# Altium PCB FPGA_PCB.PcbDoc
Units mm, origin at the board's own origin, x right, y up, seen from the top; angles counter-clockwise.
Board outline 100.13 x 101.96 mm, 4 copper layers (Top Layer, GND, VCC, Bottom Layer), stack 0.971 mm thick; 57 components, 42 nets, 309 pads, 58 vias.
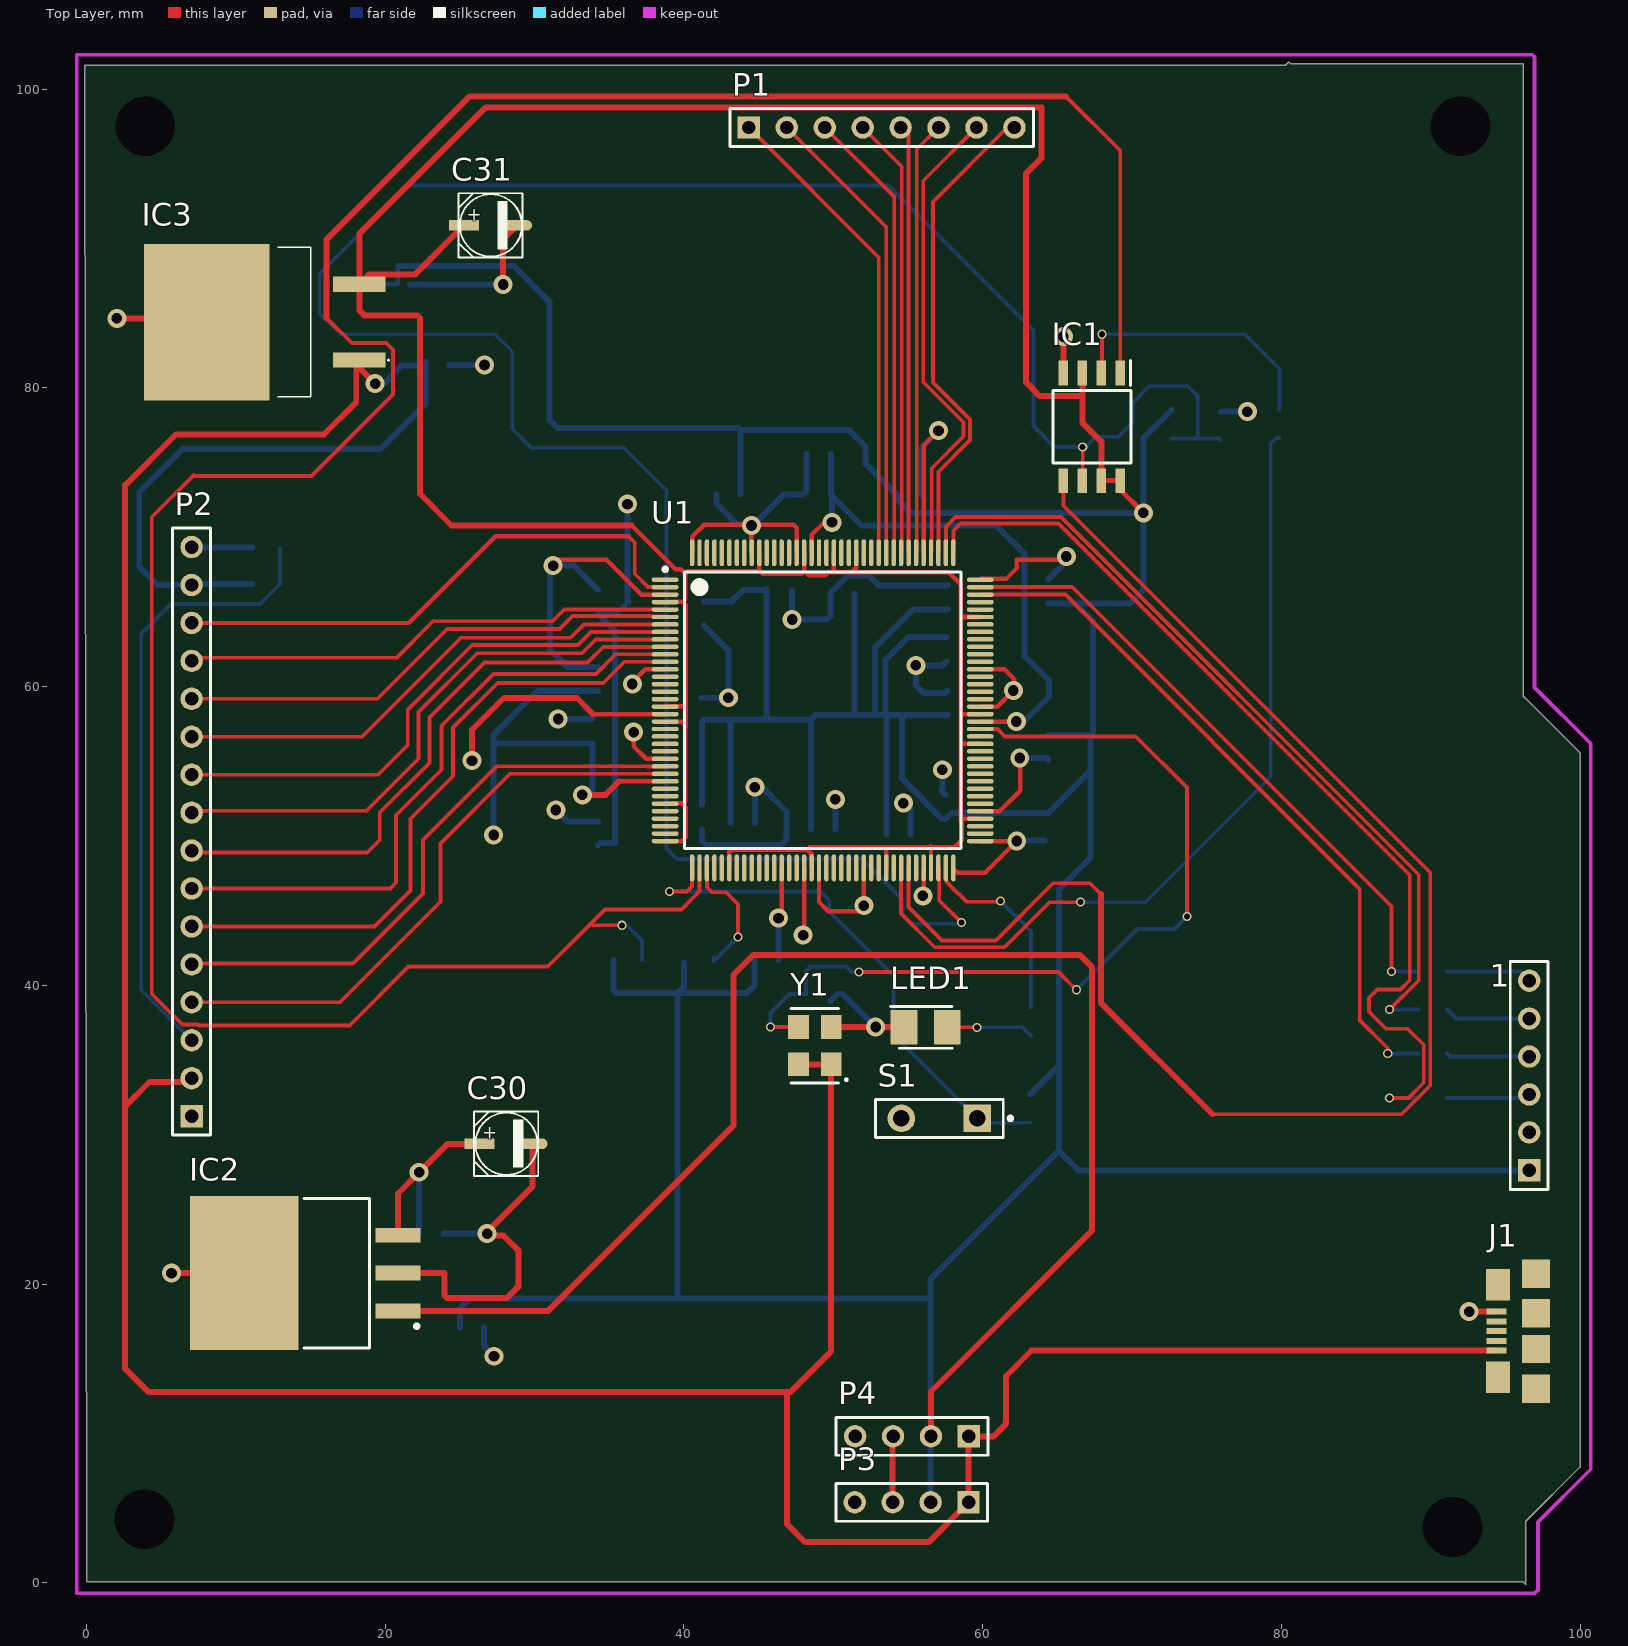
[diagram p0: Top Layer view]
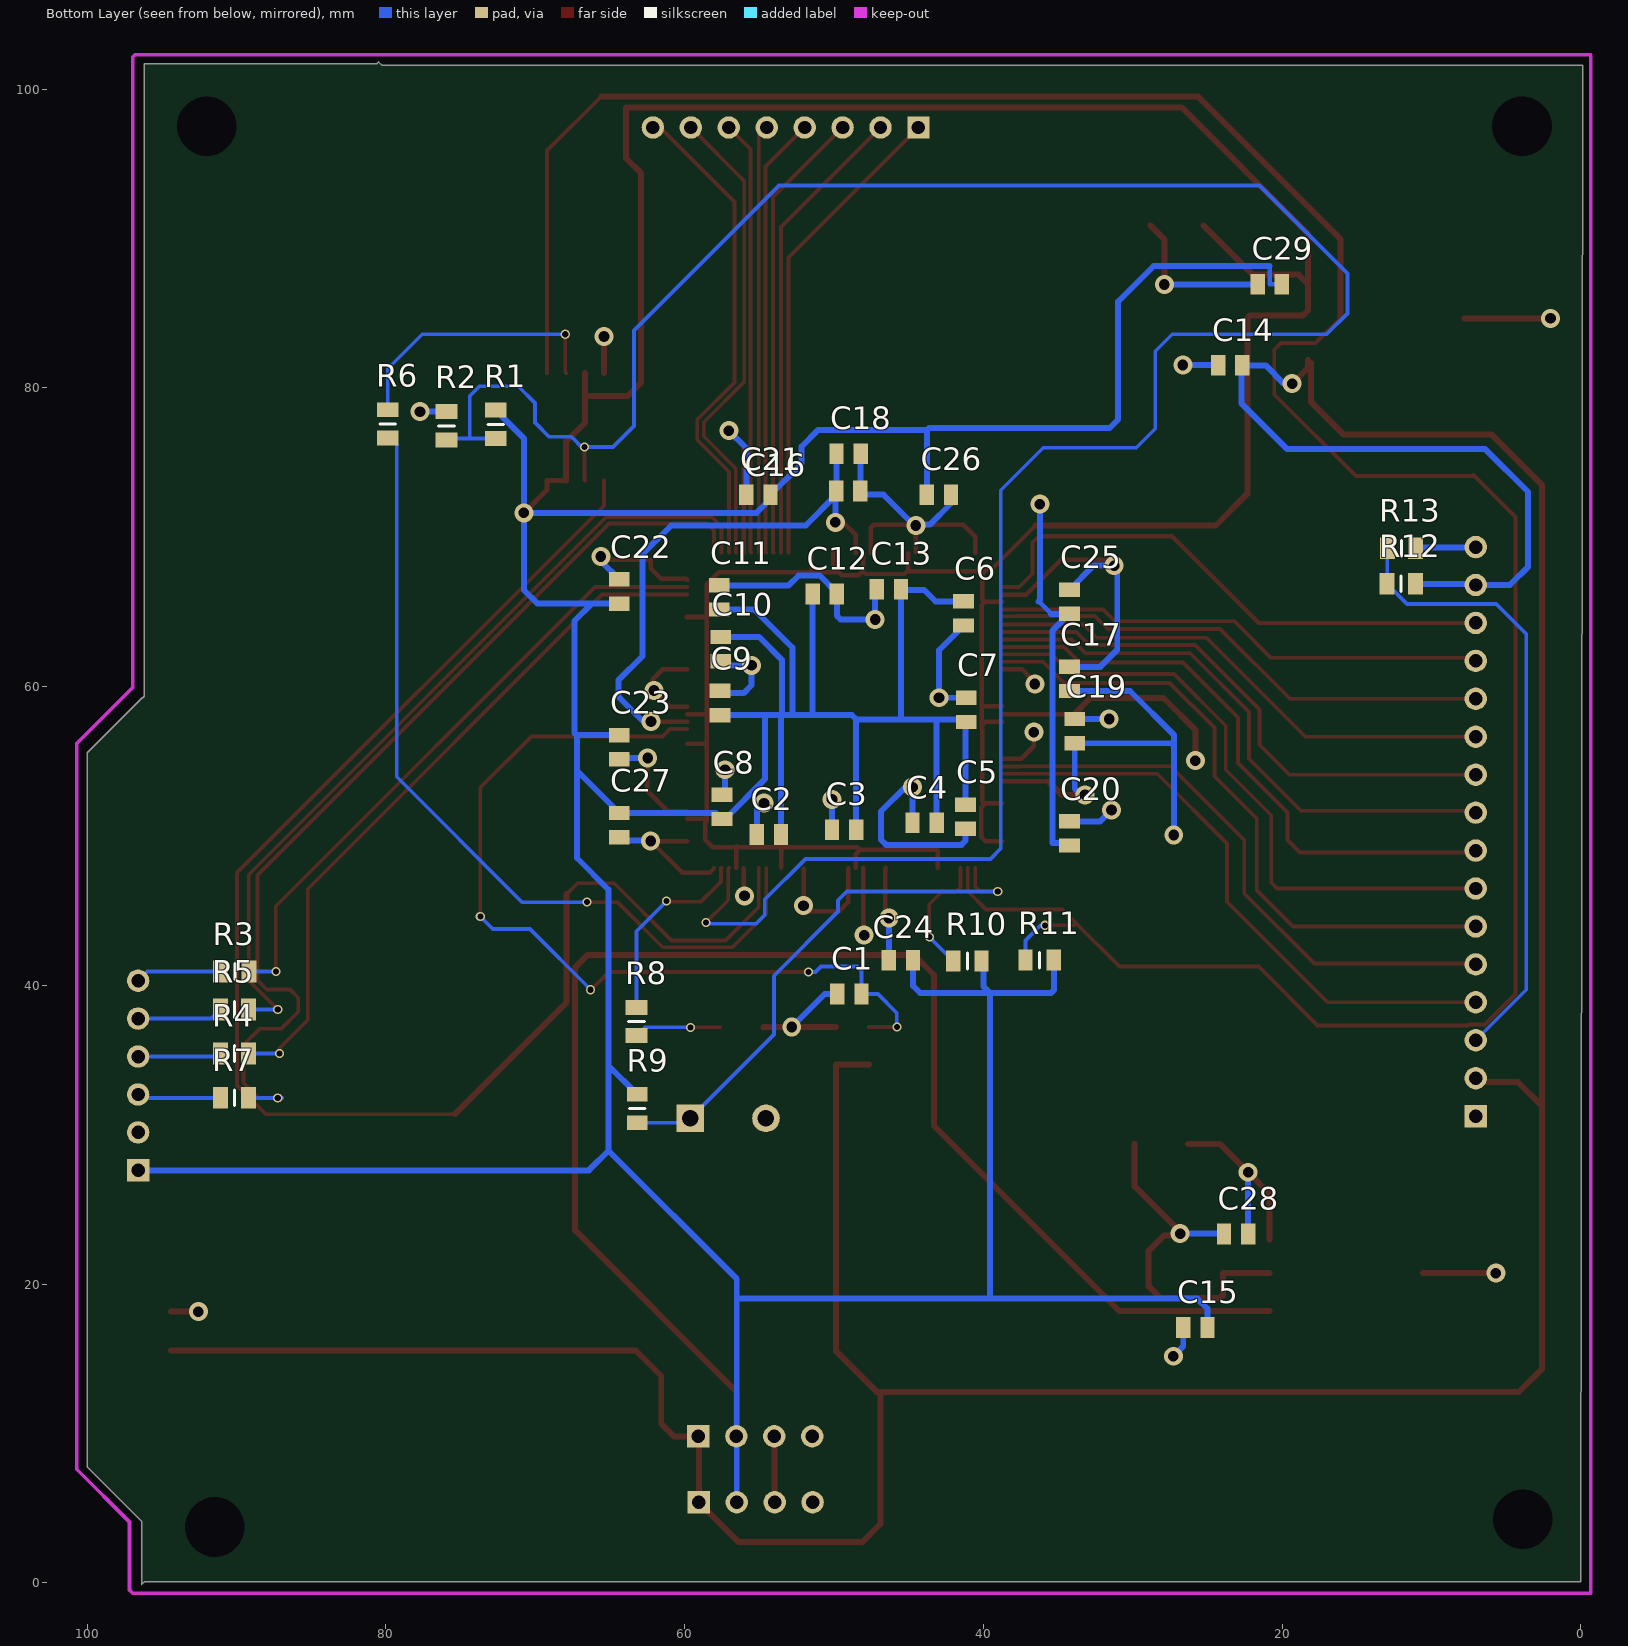
[diagram p1: Bottom Layer view, seen from below]
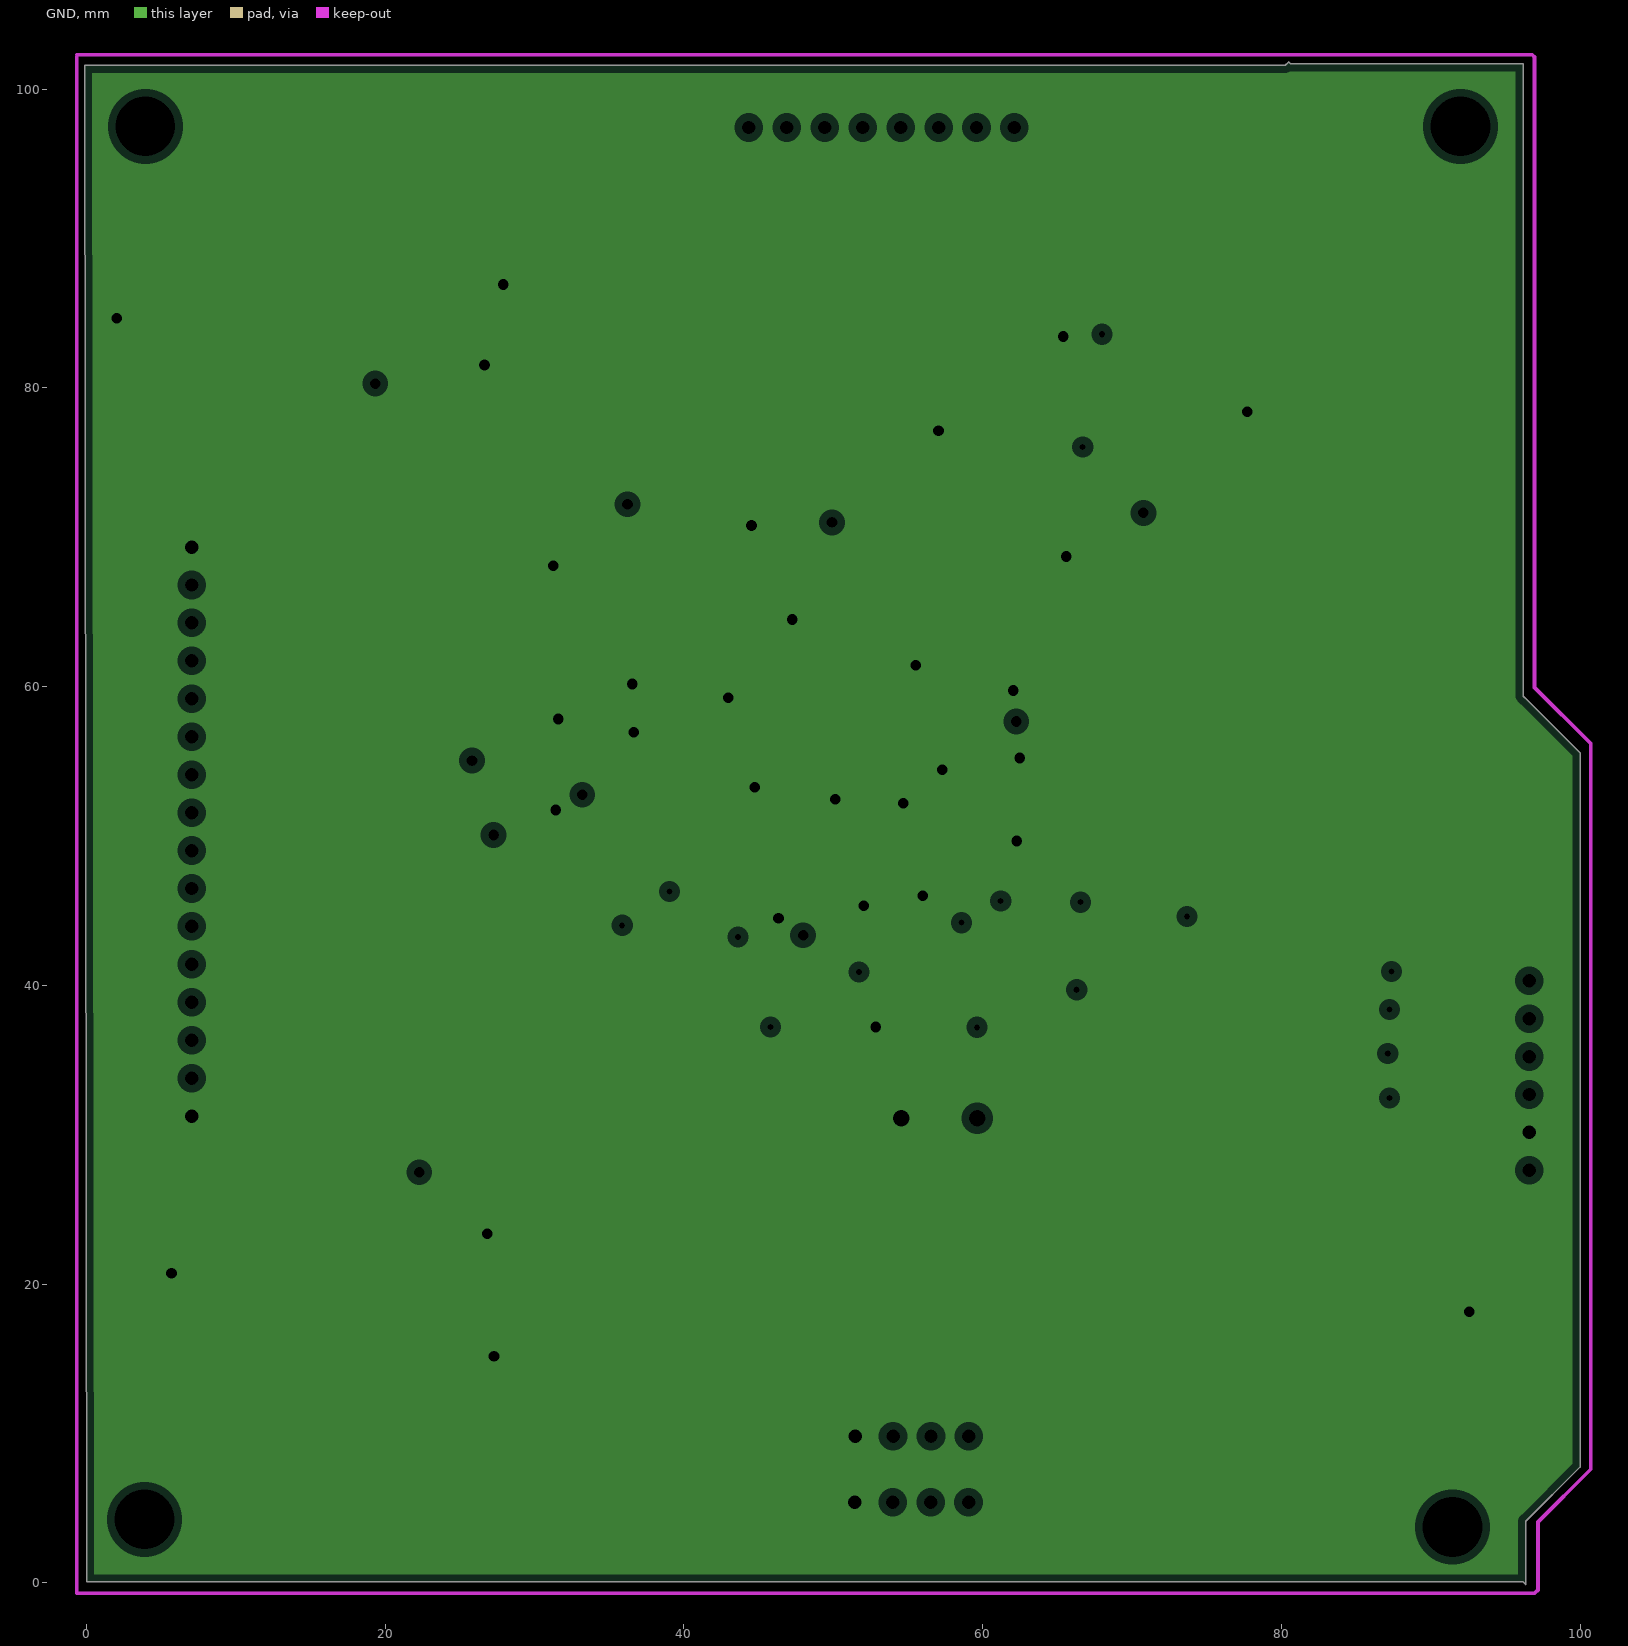
[diagram p2: GND, clearances drawn from the general rule]
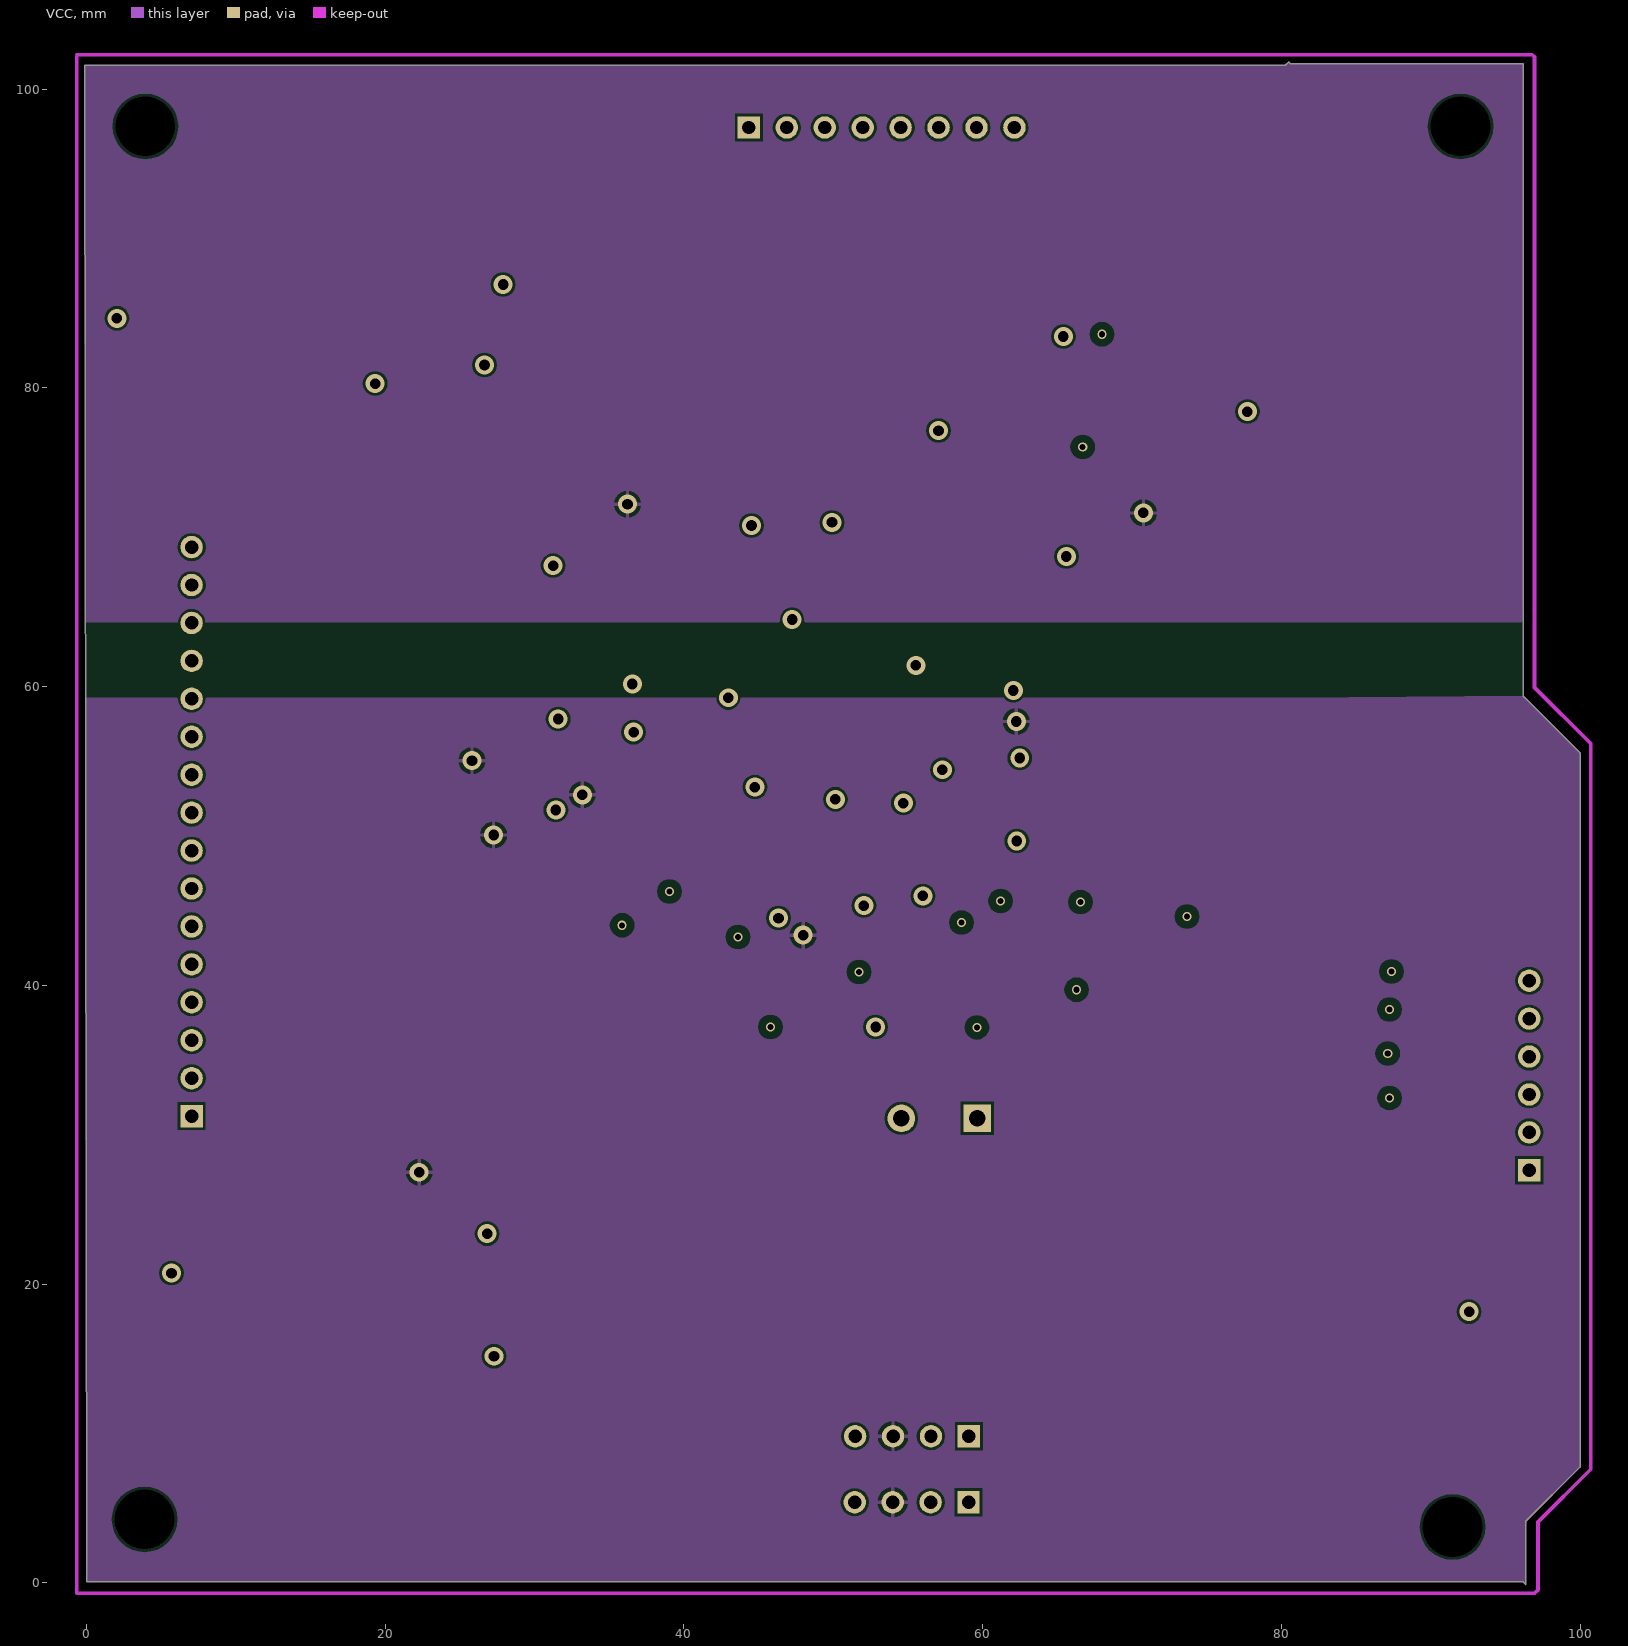
[diagram p3: VCC]
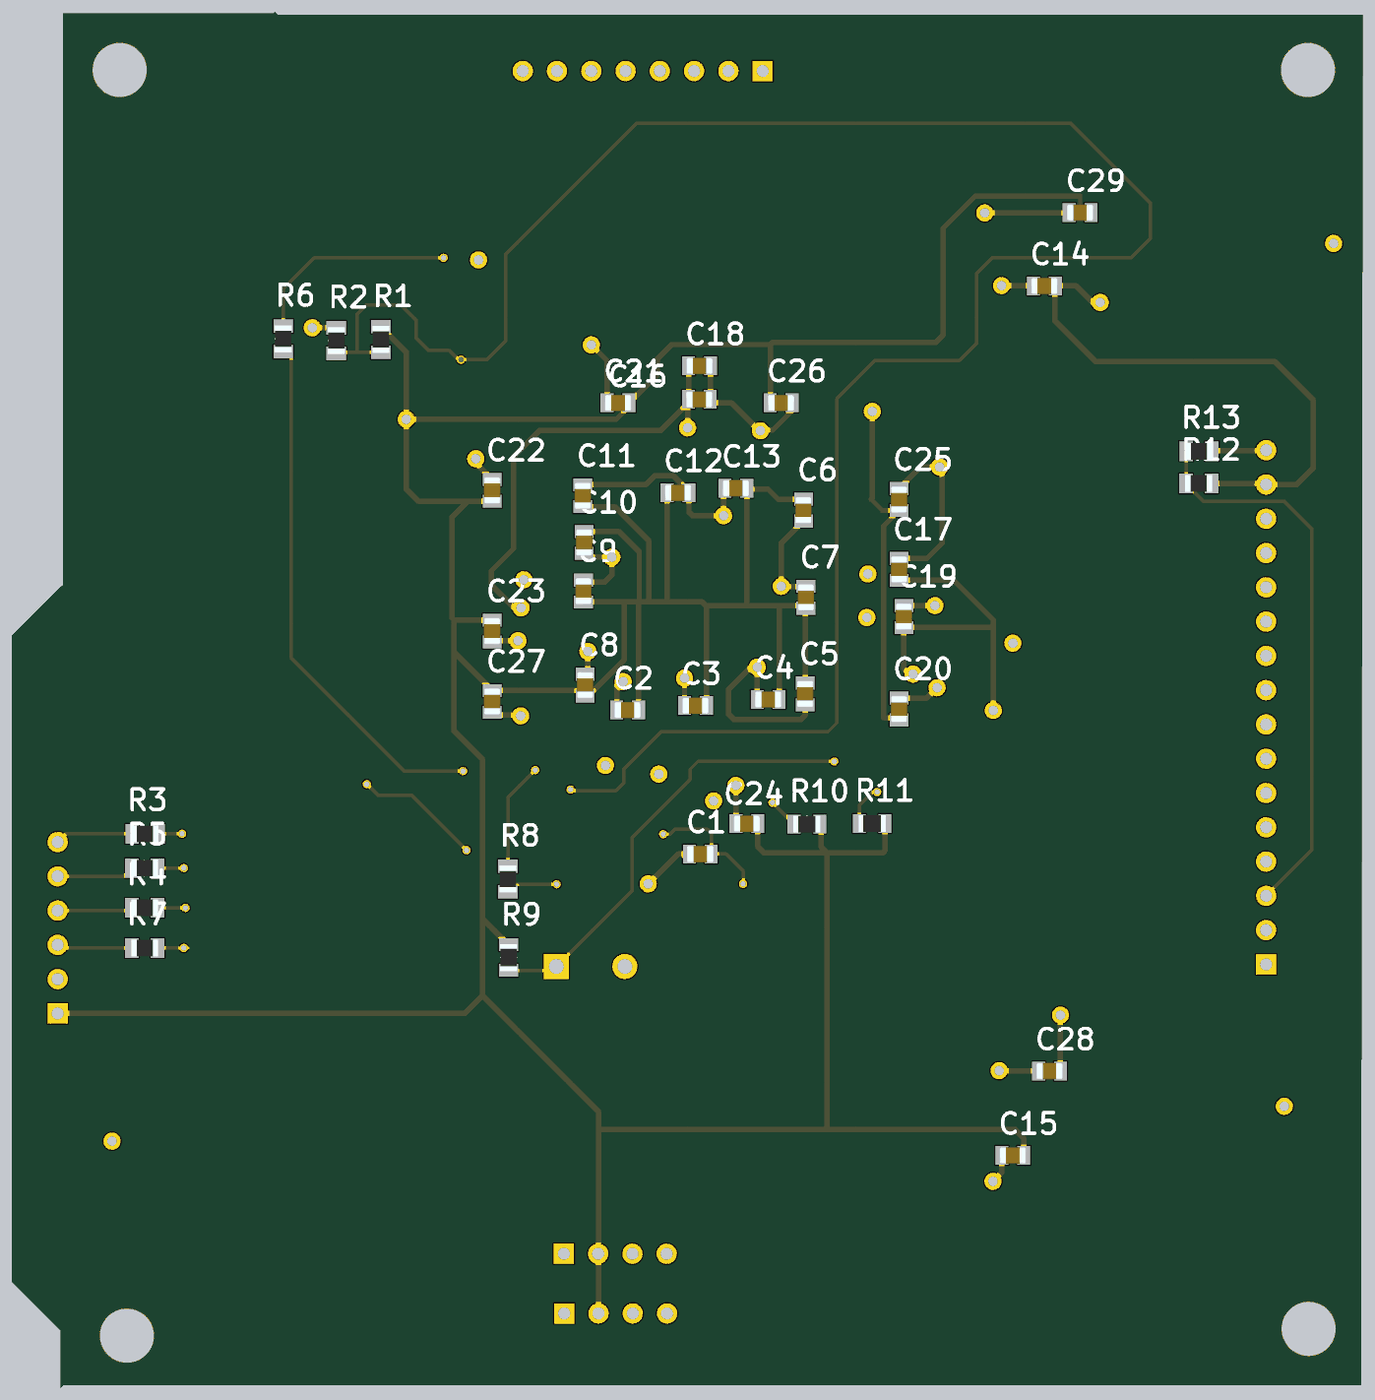
[diagram p4: 3D render of the assembled board from below, using the file's embedded part models]

## Layer stack, top to bottom
Top Solder: solder mask 0.0102, Solder Resist, Dk 3.5
Top Layer: signal copper 0.0356
Dielectric 2: dielectric 0.254, Dk 4.2
GND: plane copper 0.036, net GND
Dielectric 1: dielectric 0.32, FR-4, Dk 4.8
VCC: signal copper 0.036
Dielectric 3: dielectric 0.254, Dk 4.2
Bottom Layer: signal copper 0.0356
Bottom Solder: solder mask 0.0102, Solder Resist, Dk 3.5

## Board outline
0,0.051 96.19,0.051 96.368,-0.127 96.368,4.115 100,7.747 100,55.575 96.317,59.258 96.291,59.258 96.19,59.36 96.19,101.702 80.62,101.702 80.493,101.829 80.264,101.6 -0.127,101.6

## Design rules (kind name [scope] priority, off if disabled: settings)
Clearance [All] p1: gap=0.178 ignorepadtopadclearanceinfootprint=FALSE
HoleSize [All] p1: absolutevalues=TRUE maxlimit=5.08 minlimit=0.025 maxpercent=80.000 minpercent=20.000
MinimumSolderMaskSliver [All] p1: minsoldermaskwidth=0
PlaneClearance [All] p1: clearance=0.508
PlaneConnect [All] p1: planeconnectstyle=Relief reliefexpansion=0.508 reliefentries=4 reliefconductorwidth=0.254 reliefairgap=0.254
PolygonConnect [All] p1: connectstyle=Relief reliefconductorwidth=0.254 reliefentries=4 polygonreliefangle="90 Angle" airgapwidth=0.254
RoutingVias [All] p1: holewidth=0.406 width=0.61 viastyle="Through Hole" minholewidth=0.406 minwidth=0.61 maxholewidth=0.711 maxwidth=1.27
SilkToSilkClearance [All] p1: silktosilkclearance=0
SilkToSolderMaskClearance [IsPad] p1: minsilkscreentomaskgap=0 clearancetoexposedcopper=TRUE
SolderMaskExpansion [All] p1: expansion=0.102
Width "Schematic Width Constraint_3" [InNet('VCC')] p1: maxlimit=0.4 minlimit=0.254 preferedwidth=0.4 toplayer_minwidth=0.3 midlayer1_maxwidth=0.254 midlayer1_prefwidth=0.254 bottomlayer_minwidth=0.3 minimp=50.000000 maximp=50.000000 favimp=50.000000
Width "Schematic Width Constraint_2" [InNet('GND')] p2: maxlimit=0.4 minlimit=0.254 preferedwidth=0.4 toplayer_minwidth=0.3 midlayer1_maxwidth=0.254 midlayer1_prefwidth=0.254 bottomlayer_minwidth=0.3 minimp=50.000000 maximp=50.000000 favimp=50.000000
Width "Schematic Width Constraint_1" [InNet('3.3V')] p3: maxlimit=0.4 minlimit=0.3 preferedwidth=0.4 midlayer1_minwidth=0 minimp=50.000000 maximp=50.000000 favimp=50.000000
Width "Schematic Width Constraint" [InNet('1.2V')] p4: maxlimit=0.4 minlimit=0.254 preferedwidth=0.4 toplayer_minwidth=0.3 midlayer1_maxwidth=0.254 midlayer1_prefwidth=0.254 bottomlayer_minwidth=0.3 minimp=50.000000 maximp=50.000000 favimp=50.000000
Width [All] p5: maxlimit=0.762 minlimit=0.254 preferedwidth=0.254
24 further rules are at their usual default settings.

## Classes and differential pairs
component class FPGA: C2 C3 C4 C5 C6 C7 C8 C9 C10 C11 C12 C13 C14 C15 C16 C17 C18 C19 C20 C21 C22 C23 C24 C25 C26 C27 C28 C29 C30 C31 IC2 IC3 J1 P3 P4
component class BANK_3: P2 R12 R13
component class BANK_2: 1 IC1 LED1 R1 R2 R3 R4 R5 R6 R7 R8 R9 R10 R11 S1
component class BANK_0: C1 P1 Y1

## Components (designator, comment, footprint, x,y, rotation, side; value= is the part's Value field where it differs from the comment)
1 "JTAG USB Cable" HDR1X6 96.596,27.61 r90 top
C1 "100PF" CAPC2012X90N 48.974,39.421 r0 bottom
C2 "4.7UF" CAPC2012X135N 54.359,50.089 r180 bottom
C3 "0.47UF" CAPC2012X135N 49.327,50.419 r180 bottom
C4 "0.47UF" CAPC2012X135N 43.939,50.876 r180 bottom
C5 "4.7UF" CAPC2012X135N 41.199,51.285 r90 bottom
C6 "0.47UF" CAPC2012X135N 41.326,64.9 r90 bottom
C7 "0.47UF" CAPC2012X135N 41.148,58.443 r270 bottom
C8 "4.7UF" CAPC2012X135N 57.506,51.94 r270 bottom
C9 "0.47UF" CAPC2012X135N 57.633,58.903 r270 bottom
C10 "0.47UF" CAPC2012X135N 57.582,62.507 r90 bottom
C11 "4.7UF" CAPC2012X135N 57.683,65.967 r270 bottom
C12 "0.47UF" CAPC2012X135N 50.619,66.192 r0 bottom
C13 "0.47UF" CAPC2012X135N 46.332,66.523 r180 bottom
C14 "10UF" CAPC2012X135N 23.47,81.509 r0 bottom
C15 "10UF" CAPC2012X135N 25.809,17.094 r0 bottom
C16 "4.7UF" CAPC2012X135N 49.047,73.101 r0 bottom
C17 "4.7UF" CAPC2012X135N 34.239,60.512 r270 bottom
C18 "4.7UF" CAPC2012X135N 49.023,75.59 r0 bottom
C19 "0.47UF" CAPC2012X135N 33.884,57.016 r270 bottom
C20 "4.7UF" CAPC2012X135N 34.239,50.168 r270 bottom
C21 "4.7UF" CAPC2012X135N 55.067,72.847 r180 bottom
C22 "4.7UF" CAPC2012X135N 64.389,66.367 r270 bottom
C23 "4.7UF" CAPC2012X135N 64.389,55.94 r90 bottom
C24 "4.7UF" CAPC2012X135N 45.52,41.681 r180 bottom
C25 "4.7UF" CAPC2012X135N 34.239,65.684 r270 bottom
C26 "4.7UF" CAPC2012X135N 42.98,72.847 r0 bottom
C27 "0.47UF" CAPC2012X135N 64.389,50.727 r90 bottom
C28 "10UF" CAPC2012X135N 23.086,23.343 r0 bottom
C29 "10UF" CAPC2012X135N 20.825,86.944 r0 bottom
C30 "10uF-16V" PANACAP-b 28.092,29.388 r0 top
C31 "10uF-16V" PANACAP-b 27.051,90.881 r0 top
IC1 "IC FLASH 8M SPI 104MHZ 8SOIC" SOIC127P790X216-8N 67.31,77.394 r270 top
IC2 "IC REG LINEAR 1.2V 1.5A D2PAK" TO254P1420X457-4N 14.656,20.726 r180 top
IC3 "REG 3.3" NCV8674DS50R4G 12.065,84.404 r90 top
J1 "10118192-0001LF" 10118192-0001LF_10118192-0001LF(Primary) 98.503,16.846 r90 top
LED1 "LED GREEN CLEAR 3528 SMD" LEDM3528X210N 56.183,37.186 r0 top
P1 "Header 8" HDR1X8 44.348,97.434 r0 top
P2 "Header 16" HDR1X16 7.036,31.242 r90 top
P3 "Header 4" HDR1X4 59.055,5.385 r180 top
P4 "Header 4" HDR1X4 59.08,9.804 r180 top
R1 "RES 100" RESC2012X65N 72.644,77.556 r270 bottom
R2 "RES 100" RESC2012X65N 75.946,77.46 r90 bottom
R3 "RES 100" RESC2012X65N 90.119,40.919 r0 bottom
R4 "RES 100" RESC2012X65N 90.145,35.433 r0 bottom
R5 "RES 100" RESC2012X65N 90.145,38.379 r0 bottom
R6 "RES 100" RESC2012X65N 79.883,77.587 r90 bottom
R7 "RES 100" RESC2012X65N 90.145,32.461 r0 bottom
R8 "RES 330" RESC2012X65N 63.229,37.577 r90 bottom
R9 "RES 4.7K" RESC2012X60N 63.179,31.75 r270 bottom
R10 "RES 4.7K" RESC2012X60N 41.072,41.631 r0 bottom
R11 "RES 4.7K" RESC2012X60N 36.236,41.681 r0 bottom
R12 "RMCF0805FT1K00" RESC2012X65N 12.029,66.878 r0 bottom
R13 "RMCF0805FT1K00" RESC2012X65N 12.004,69.261 r0 bottom
S1 "SW-PB" SPST-2 57.099,31.09 r180 top
U1 "XC6SLX9-2TQG144C" TQG144_N 49.292,58.41 r0 top
Y1 "XTAL OSC XO 20.0000MHZ CMOS SMD" KC5032A12.0000CM0E00 48.76,35.961 r90 top

## Footprints (in the part's own frame and the unit in brackets; to place one, negate y for a bottom-side part, rotate by r counter-clockwise, add the part's x,y. Pads: shape width x height; smd on the part's side, far side on the other; paste and mask are expansions set on the pad)
10118192-0001LF_10118192-0001LF(Primary) [mm]
  rect 0.4x1.35 smd: 1(-1.3,4.1) 2(-0.65,4.1) 3(0,4.1) 4(0.65,4.1) 5(1.3,4.1)
  rect 1.9x1.9 smd: M1(-1.2,1.45) M2(1.2,1.45) S1(-3.85,1.45) S2(3.85,1.45)
  rect 2.1x1.6 smd: S3(-3.1,4) S4(3.1,4)
CAPC2012X90N [mm]
  rect 0.96x1.39 smd: 1(-0.81,0) 2(0.81,0)
  body extent -1,-0.63 1,0.62, height 0.9
CAPC2012X135N [mm]
  rect 0.96x1.39 smd: 1(-0.81,0) 2(0.81,0)
  body extent -1,-0.63 1,0.62, height 1.35
HDR1X4 [mm] "Connector; Header; 4 Position"
  rect 1.5x1.5 hole 0.9: 1(0,0)
  round 1.5 hole 0.9: 2(2.54,0) 3(5.08,0) 4(7.62,0)
  silkscreen extent -1.27,-1.27 8.89,1.27
HDR1X6 [mm] "Connector; Header; 6 Position"
  rect 1.5x1.5 hole 0.9: 1(0,0)
  round 1.5 hole 0.9: 2(2.54,0) 3(5.08,0) 4(7.62,0) 5(10.16,0) 6(12.7,0)
  silkscreen extent -1.27,-1.27 13.97,1.27
HDR1X8 [mm] "Connector; Header; 8 Position"
  rect 1.5x1.5 hole 0.9: 1(0,0)
  round 1.5 hole 0.9: 2(2.54,0) 3(5.08,0) 4(7.62,0) 5(10.16,0) 6(12.7,0) 7(15.24,0) 8(17.78,0)
  silkscreen extent -1.27,-1.27 19.05,1.27
HDR1X16 [mm] "Connector; Header; 16 Position"
  rect 1.5x1.5 hole 0.9: 1(0,0)
  round 1.5 hole 0.9: 2(2.54,0) 3(5.08,0) 4(7.62,0) 5(10.16,0) 6(12.7,0) 7(15.24,0) 8(17.78,0) 9(20.32,0) 10(22.86,0) 11(25.4,0) 12(27.94,0) 13(30.48,0) 14(33.02,0) 15(35.56,0) 16(38.1,0)
  silkscreen extent -1.27,-1.27 39.37,1.27
KC5032A12.0000CM0E00 [mm]
  rect 1.6x1.4 smd: 1(-1.25,-1.1) 2(1.25,-1.1) 3(1.25,1.1) 4(-1.25,1.1)
  silkscreen extent -2.5,-2.17 2.5,1.6
LEDM3528X210N [mm]
  rect 1.8x2.3 smd: 1(-1.45,0) 2(1.45,0)
  silkscreen extent -2.35,-1.4 1.75,1.4
NCV8674DS50R4G [mm]
  rect 1.016x3.504 smd: 1(-2.54,-6.2) 3(2.54,-6.2)
  rect 10.49x8.38 smd: 4(0,4.013)
  silkscreen extent -5,-8.2 5,-0.75
PANACAP-b [mm]
  rect 2x0.7 smd: +(-1.778,0)
  oval 2x0.7 smd: -(1.778,0)
  silkscreen extent -2.15,-2.15 2.15,2.15, body extent -2.3,-2.15 2.3,2.15, height 5.4
RESC2012X60N [mm]
  rect 0.95x1.4 smd: 1(-0.95,0) 2(0.95,0)
  silkscreen extent 0,-0.53 0,0.53, body extent -1,-0.62 1,0.62, height 0.6
RESC2012X65N [mm]
  rect 1x1.45 smd: 1(-0.95,0) 2(0.95,0)
  silkscreen extent 0,-0.53 0,0.53, body extent -1,-0.63 1,0.63, height 0.65
SOIC127P790X216-8N [mm]
  rect 1.65x0.65 smd: 1(-3.6,1.905) 2(-3.6,0.635) 3(-3.6,-0.635) 4(-3.6,-1.905) 5(3.6,-1.905) 6(3.6,-0.635) 7(3.6,0.635) 8(3.6,1.905)
  silkscreen extent -4.43,-2.62 2.42,2.62, body extent -3.95,-2.62 3.95,2.62, height 2.16
SPST-2 [mm] "Switch; 2 Leads"
  rect 1.85x1.85 hole 1.1: 1(-2.54,0)
  round 1.85 hole 1.1: 2(2.54,0)
  silkscreen extent -4.89,-1.27 4.28,1.27
TO254P1420X457-4N [mm]
  rect 3x1 smd: 1(-6.2,2.54) 2(-6.2,0) 3(-6.2,-2.54)
  rect 7.25x10.3 smd: 4(4.1,0)
  silkscreen extent -7.58,-5 0.1,5
TQG144_N [mm] "Thin QFP, 144-Leads, Body 20x20mm, Pitch 0.5mm, IPC Medium Density"
  oval 1.8x0.3 smd: 1(-10.55,8.75) 2(-10.55,8.25) 3(-10.55,7.75) 4(-10.55,7.25) 5(-10.55,6.75) 6(-10.55,6.25) 7(-10.55,5.75) 8(-10.55,5.25) 9(-10.55,4.75) 10(-10.55,4.25) 11(-10.55,3.75) 12(-10.55,3.25) 13(-10.55,2.75) 14(-10.55,2.25) 15(-10.55,1.75) 16(-10.55,1.25) 17(-10.55,0.75) 18(-10.55,0.25) 19(-10.55,-0.25) 20(-10.55,-0.75) 21(-10.55,-1.25) 22(-10.55,-1.75) 23(-10.55,-2.25) 24(-10.55,-2.75) 25(-10.55,-3.25) 26(-10.55,-3.75) 27(-10.55,-4.25) 28(-10.55,-4.75) 29(-10.55,-5.25) 30(-10.55,-5.75) 31(-10.55,-6.25) 32(-10.55,-6.75) 33(-10.55,-7.25) 34(-10.55,-7.75) 35(-10.55,-8.25) 36(-10.55,-8.75) 73(10.55,-8.75) 74(10.55,-8.25) 75(10.55,-7.75) 76(10.55,-7.25) 77(10.55,-6.75) 78(10.55,-6.25) 79(10.55,-5.75) 80(10.55,-5.25) 81(10.55,-4.75) 82(10.55,-4.25) 83(10.55,-3.75) 84(10.55,-3.25) 85(10.55,-2.75) 86(10.55,-2.25) 87(10.55,-1.75) 88(10.55,-1.25) 89(10.55,-0.75) 90(10.55,-0.25) 91(10.55,0.25) 92(10.55,0.75) 93(10.55,1.25) 94(10.55,1.75) 95(10.55,2.25) 96(10.55,2.75) 97(10.55,3.25) 98(10.55,3.75) 99(10.55,4.25) 100(10.55,4.75) 101(10.55,5.25) 102(10.55,5.75) 103(10.55,6.25) 104(10.55,6.75) 105(10.55,7.25) 106(10.55,7.75) 107(10.55,8.25) 108(10.55,8.75)
  oval 0.3x1.8 smd: 37(-8.75,-10.55) 38(-8.25,-10.55) 39(-7.75,-10.55) 40(-7.25,-10.55) 41(-6.75,-10.55) 42(-6.25,-10.55) 43(-5.75,-10.55) 44(-5.25,-10.55) 45(-4.75,-10.55) 46(-4.25,-10.55) 47(-3.75,-10.55) 48(-3.25,-10.55) 49(-2.75,-10.55) 50(-2.25,-10.55) 51(-1.75,-10.55) 52(-1.25,-10.55) 53(-0.75,-10.55) 54(-0.25,-10.55) 55(0.25,-10.55) 56(0.75,-10.55) 57(1.25,-10.55) 58(1.75,-10.55) 59(2.25,-10.55) 60(2.75,-10.55) 61(3.25,-10.55) 62(3.75,-10.55) 63(4.25,-10.55) 64(4.75,-10.55) 65(5.25,-10.55) 66(5.75,-10.55) 67(6.25,-10.55) 68(6.75,-10.55) 69(7.25,-10.55) 70(7.75,-10.55) 71(8.25,-10.55) 72(8.75,-10.55) 109(8.75,10.55) 110(8.25,10.55) 111(7.75,10.55) 112(7.25,10.55) 113(6.75,10.55) 114(6.25,10.55) 115(5.75,10.55) 116(5.25,10.55) 117(4.75,10.55) 118(4.25,10.55) 119(3.75,10.55) 120(3.25,10.55) 121(2.75,10.55) 122(2.25,10.55) 123(1.75,10.55) 124(1.25,10.55) 125(0.75,10.55) 126(0.25,10.55) 127(-0.25,10.55) 128(-0.75,10.55) 129(-1.25,10.55) 130(-1.75,10.55) 131(-2.25,10.55) 132(-2.75,10.55) 133(-3.25,10.55) 134(-3.75,10.55) 135(-4.25,10.55) 136(-4.75,10.55) 137(-5.25,10.55) 138(-5.75,10.55) 139(-6.25,10.55) 140(-6.75,10.55) 141(-7.25,10.55) 142(-7.75,10.55) 143(-8.25,10.55) 144(-8.75,10.55)
  silkscreen extent -10.67,-9.25 9.25,9.57, body extent -10,-10 10,10, height 1.6

## Part data
1: "DIGILENT         250-003            PROGRAMMING CABLE, JTAG TO USB", Manufacturer=Digilent, Manufacturer Part Number=250-003, Package Quantity=1, Supplier Part Number 1=1286-1052-ND, Category=Programmers, ComponentLink1Description=http://www.digilentinc.com/Data/Products/JTAG-USB/JTAG-USB%20Cable_rm.pdf?src-supplier=Digi-Key, ComponentLink1URL=http://www.digilentinc.com/Data/Products/JTAG-USB/JTAG-USB%20Cable_rm.pdf?src-supplier=Digi-Key, Number of Pins=6, Pricing 1="1=59 (USD)", REACH SVHC="No SVHC", Stock 1=33, Supplier 1=Digi-Key
C1: library part "CAP CER 0.1UF 16V X7R 0805", "Capacitor", Manufacturer_Name="Wurth Elektronik", Manufacturer_Part_Number=885012207045, Mouser Part Number=710-885012207045, RS Part Number=1814041P, Datasheet Link=https://katalog.we-online.com/pbs/datasheet/885012207045.pdf, Height=0.9mm, Mouser Price/Stock=https://www.mouser.com/Search/Refine.aspx?Keyword=710-885012207045, RS Price/Stock=http://uk.rs-online.com/web/p/products/1814041P
C2 C5 C8 C11 C16 C17 C18 C20 C21 C22 C23 C24 C25 C26: library part "CAP CER 4.7UF 16V X5R 0805", "Capacitor", Manufacturer_Name="Wurth Elektronik", Manufacturer_Part_Number=885012107013, Mouser Part Number=710-885012107013, RS Part Number=1814065P, Datasheet Link=https://katalog.we-online.com/pbs/datasheet/885012107013.pdf, Height=1.35mm, Mouser Price/Stock=https://www.mouser.com/Search/Refine.aspx?Keyword=710-885012107013, RS Price/Stock=http://uk.rs-online.com/web/p/products/1814065P
C3 C4 C6 C7 C9 C10 C12 C13 C19 C27: library part "CAP CER 0.47UF 16V X7R 0805", "Capacitor", Manufacturer_Name="Wurth Elektronik", Manufacturer_Part_Number=885012207049, Mouser Part Number=710-885012207049, Datasheet Link=https://katalog.we-online.com/pbs/datasheet/885012207049.pdf, Height=1.35mm, Mouser Price/Stock=https://www.mouser.com/Search/Refine.aspx?Keyword=710-885012207049
C14 C15 C28 C29: library part "CAP CER 10UF 16V X5R 0805", "Capacitor", Manufacturer_Name="Wurth Elektronik", Manufacturer_Part_Number=885012107013, Mouser Part Number=710-885012107013, RS Part Number=1814065P, Datasheet Link=https://katalog.we-online.com/pbs/datasheet/885012107013.pdf, Height=1.35mm, Mouser Price/Stock=https://www.mouser.com/Search/Refine.aspx?Keyword=710-885012107013, RS Price/Stock=http://uk.rs-online.com/web/p/products/1814065P
C30 C31: library part PANACAP-10UF-16V-FK, "GENERIC CAPACITOR POLARISED", Supplier Part Number 1=PCE3782TR-ND, Supplier 1=Digi-Key
IC1: "Integrated Circuit", Manufacturer_Name=Winbond, Manufacturer_Part_Number=W25Q80DVSSIG, Mouser Part Number=454-W25Q80DVSSIG, RS Part Number=1882614P, Datasheet Link=https://www.winbond.com/resource-files/w25q80dv_revf_02112015.pdf, Height=2.16mm, Mouser Price/Stock=https://www.mouser.com/Search/Refine.aspx?Keyword=454-W25Q80DVSSIG, RS Price/Stock=http://uk.rs-online.com/web/p/products/1882614P
IC2: "Integrated Circuit", Manufacturer_Name="ON Semiconductor", Manufacturer_Part_Number=NCP565D2T12G, Mouser Part Number=863-NCP565D2T12G, RS Part Number=0464164, Allied_Number=70340882, Allied Price/Stock=http://www.alliedelec.com/on-semiconductor-ncp565d2t12g/70340882/, Datasheet Link=http://www.onsemi.com/pub/Collateral/NCP565-D.PDF, Height=4.572mm, Mouser Price/Stock=https://www.mouser.com/Search/Refine.aspx?Keyword=863-NCP565D2T12G, RS Price/Stock=http://uk.rs-online.com/web/p/products/0464164
IC3: library part "IC REG LINEAR 3.3V 1.5A D2PAK", "Integrated Circuit", Manufacturer_Name="ON Semiconductor", Manufacturer_Part_Number=NCP565D2T33R4G, Mouser Part Number=863-NCP565D2T33R4G, RS Part Number=7852432P, Datasheet Link=https://www.onsemi.com/pub/Collateral/NCP565-D.PDF, Height=4mm, Mouser Price/Stock=https://www.mouser.com/Search/Refine.aspx?Keyword=863-NCP565D2T33R4G, RS Price/Stock=http://uk.rs-online.com/web/p/products/7852432P
J1: "Conn Micro USB Type B RCP 5 POS 0.65mm Solder RA SMD 5 Terminal 1 Port T/R", Package=None, Availability=Good, MF=Amphenol, MP=10118192-0001LF, Price="0.23 USD", SnapEDA_Link=https://www.snapeda.com/parts/10118192-0001LF/Amphenol%20Solar/view-part/?ref=snap
LED1: "LED", Manufacturer_Name="Wurth Elektronik", Manufacturer_Part_Number=150141GS73100, Mouser Part Number=710-150141GS73100, RS Part Number=8154316P, Datasheet Link=https://www.mouser.com/datasheet/2/445/150141GS73100-368683.pdf, Height=2.1mm, Mouser Price/Stock=https://www.mouser.com/Search/Refine.aspx?Keyword=710-150141GS73100, RS Price/Stock=http://uk.rs-online.com/web/p/products/8154316P
P1: "Header, 8-Pin", LatestRevisionDate=17-Jul-2002, LatestRevisionNote="Re-released for DXP Platform.", Publisher="Altium Limited"
P2: "Header, 16-Pin", LatestRevisionDate=17-Jul-2002, LatestRevisionNote="Re-released for DXP Platform.", Publisher="Altium Limited"
P3 P4: "Header, 4-Pin", LatestRevisionDate=17-Jul-2002, LatestRevisionNote="Re-released for DXP Platform.", Publisher="Altium Limited"
R1 R2 R3 R4 R5 R6 R7: library part "RES SMD 100 OHM 5% 1/8W 0805", "Resistor", Manufacturer_Name="TE Connectivity", Manufacturer_Part_Number=CRG0805J100R, Mouser Part Number=279-CRG0805J100R, Datasheet Link=http://www.te.com/commerce/DocumentDelivery/DDEController?Action=showdoc&DocId=Customer+Drawing%7F1623109%7FBA%7Fpdf%7FEnglish%7FENG_CD_1623109_BA.pdf%7F1623109-1, Height=0.65mm, Mouser Price/Stock=https://www.mouser.com/Search/Refine.aspx?Keyword=279-CRG0805J100R
R8: library part "RES SMD 330 OHM 1% 1/8W 0805", "Resistor", Manufacturer_Name="TE Connectivity", Manufacturer_Part_Number=CRG0805F330R, Mouser Part Number=279-CRG0805F330R, RS Part Number=2230354P, Allied_Number=70063207, Allied Price/Stock=https://www.alliedelec.com/te-connectivity-crg0805f330r/70063207/, Datasheet Link=http://www.te.com/commerce/DocumentDelivery/DDEController?Action=showdoc&DocId=Customer+Drawing%7F1623109%7FBA%7Fpdf%7FEnglish%7FENG_CD_1623109_BA.pdf%7F1623109-1, Height=0.65mm, Mouser Price/Stock=https://www.mouser.com/Search/Refine.aspx?Keyword=279-CRG0805F330R, RS Price/Stock=http://uk.rs-online.com/web/p/products/2230354P
R9 R10 R11: library part "RES SMD 4.7K OHM 1% 1/8W 0805", "Resistor", Manufacturer_Name="YAGEO (PHYCOMP)", Manufacturer_Part_Number=RC0805FR-074K7L, Mouser Part Number=603-RC0805FR-074K7L, RS Part Number=6181408, Datasheet Link=http://www.yageo.com/documents/recent/PYu-RC_Group_51_RoHS_L_10.pdf, Height=0.6mm, Mouser Price/Stock=https://www.mouser.com/Search/Refine.aspx?Keyword=603-RC0805FR-074K7L, RS Price/Stock=http://uk.rs-online.com/web/p/products/6181408
R12 R13: library part "RES 1K OHM 1% 1/8W 0805", "Resistor", Package="2012 Stackpole", Availability=Unavailable, MF="Stackpole Electronics Inc", MP=RMCF0805FT1K00, Price=None, SnapEDA_Link=https://www.snapeda.com/parts/RMCF0805FT1K00/Stackpole%20Electronics%20Inc/view-part/3228308/?ref=snap
S1: "Switch", LatestRevisionDate=17-Jul-2002, LatestRevisionNote="Re-released for DXP Platform.", PackageDescription="Switch; 2 Leads", PackageReference=SPST-2, Published=24-Mar-1999, Publisher="Altium Limited"
U1: "Spartan-6 LX 1.2V FPGA, 102 User I/Os, 144-Pin TQFP (0.5mm Pitch), Speed Grade 2, Commercial Grade, Pb-Free", Code_JEDEC=MS-026-BFB, ComponentLink1Description="Manufacturer URL", ComponentLink1URL=http://www.xilinx.com/, ComponentLink2Description="Spartan-6 Datasheet", ComponentLink2URL=http://www.xilinx.com/support/documentation/data_sheets/ds160.pdf, ComponentLink3Description="Spartan-6 Documents", ComponentLink3URL=http://www.xilinx.com/support/documentation/spartan-6.htm, DatasheetVersion="ver1.6, Nov-2010", PackageDescription="144-Pin Thin Quad Flat Pack (TQG144) - Pb-Free", PackageReference=TQG144, PackageVersion="ver1.2, Jun-2004"
Y1: "Crystal or Oscillator", Manufacturer_Name=KYOCERA, Manufacturer_Part_Number=KC5032A20.0000CMGE00, Mouser Part Number=581-KC5032A20.CMGE, Datasheet Link=http://global.kyocera.com/prdct/electro/product/pdf/kc5032a_cm_e.pdf

## Free pads (board coordinates)
  round 0 smd paste+0 mask+0: 2(91.999,98.019)
  round 1.524 hole 4: 3(91.465,3.734) 4(3.886,4.242) 5(3.937,97.511) 8(91.999,97.511)

## Via types
v1: diameter 1.27, hole 0.711, Top Layer to Bottom Layer, 41 vias
v2: diameter 0.61, hole 0.406, Top Layer to Bottom Layer, 17 vias

## Nets (pads, with @x,y where several pads share a name; then routed paths per layer and width w, separated by ;. In a path a pad name is that pad's centre, name@x,y a point inside that pad or via, vN(x,y) a via of type N, cw(c..) or ccw(c..) an arc to the next point about the centre after c; other vN are vias at no path point)
1.2V: C16.2 C17.2 C18.2 C19.2 C28.1 C30.+ IC2.3 P3.3 P4.3 U1.19 U1.28 U1.52 U1.89 U1.128 | length 108.8
  Top Layer w0.3: 33.915,58.16 U1.19 ; 35.652,53.66 U1.28 ; v1(47.981,43.358) 47.981,43.227 48.042,43.166 U1.52 ; U1.128 48.542,70.158 49.378,70.993 v1(49.911,70.993) ; U1.89 v1(62.253,57.66)
  Top Layer w0.4: IC2.3@20.856,22.985 IC2.3 20.856,26.063 v1(22.276,27.483) 24.181,29.388 C30.+ ; v1(25.806,55.042) 25.806,57.099 27.94,59.233 32.842,59.233 33.915,58.16 ; v1(33.198,52.756) 34.747,52.756 35.652,53.66 ; P3.3 P4.3@53.975,9.779
  Bottom Layer w0.4: C28.1 v1(22.276,27.483) ; v1(27.254,50.063) 27.254,55.956 ; v1(33.198,52.756) 33.477,52.756 33.884,53.162 C19.2 27.327,56.206 27.254,55.956 ; C17.2 30.187,59.702 27.254,56.769 27.254,55.956 ; C16.2@49.833,72.847 C18.2 ; C16.2@49.835,72.846 C16.2@49.911,72.77 ; v1(49.911,70.993) C16.2@49.911,72.77 ; v1(62.253,57.66) 62.766,57.66 64.44,59.334 64.44,60.427 62.814,62.052 62.814,68.885 60.909,70.79 51.891,70.79 C16.2@49.911,72.77
3.3V: 1.1 C2.2 C3.2 C4.2 C5.2 C6.2 C7.2 C8.2 C9.2 C10.2 C11.2 C12.2 C13.2 C15.1 C20.2 C21.2 C22.2 C23.2 C24.2 C25.2 C26.2 C27.2 C29.1 C31.+ IC1.3 IC1.7 IC1.8 IC2.1 IC3.3 P3.2 P4.2 R1.1 R9.1 R10.1 R11.1 U1.4 U1.18 U1.20 U1.31 U1.36 U1.42 U1.53 U1.63 U1.69 U1.76 U1.86 U1.90 U1.103 U1.122 U1.125 U1.129 U1.135 | length 714.5
  Top Layer w0.3: 36.506,70.79 39.427,67.869 39.776,67.869 40.081,67.564 ; U1.31@38.735,52.183 39.989,52.183 40.081,52.275 40.081,57.226 ; U1.36 39.884,49.66 40.132,49.908 40.132,51.921 39.929,52.123 ; U1.20 39.847,57.66 40.081,57.426 40.081,57.226 ; U1.18@38.742,58.668 39.929,58.668 40.107,58.846 ; U1.4@38.742,65.668 39.919,65.668 ; U1.42 43.042,49.01 43.12,49.088 48.24,49.088 ; U1.135@45.042,68.923 45.042,67.736 44.744,67.736 44.74,67.733 44.344,67.733 44.341,67.736 44.244,67.736 44.24,67.733 43.844,67.733 43.841,67.736 43.744,67.736 43.74,67.733 43.344,67.733 43.341,67.736 43.244,67.736 43.24,67.733 42.844,67.733 42.841,67.736 42.744,67.736 42.74,67.733 42.344,67.733 42.341,67.736 42.244,67.736 42.24,67.733 41.844,67.733 41.841,67.736 41.744,67.736 41.74,67.733 41.344,67.733 41.341,67.736 41.244,67.736 41.24,67.733 40.844,67.733 40.841,67.736 40.744,67.736 40.74,67.733 40.344,67.733 40.341,67.736 40.253,67.736 40.081,67.564 ; 45.088,67.736 45.285,67.539 47.89,67.539 48.088,67.736 ; U1.129 48.042,67.781 48.088,67.736 ; 48.24,49.073 48.255,49.073 ; U1.53 48.542,48.777 48.52,48.799 48.52,48.808 48.255,49.073 ; U1.125 50.038,68.956 50.038,67.658 ; U1.122@51.542,68.923 51.542,67.96 51.24,67.658 ; U1.63 53.542,49.25 56.515,49.25 58.114,49.25 58.615,49.75 58.615,51.1 ; 53.543,49.251 48.433,49.251 48.255,49.073 ; U1.69 56.542,49.222 ; 58.664,56.16 U1.86 ; 58.663,58.16 U1.90 ; U1.76 59.82,51.138 58.653,51.138 58.615,51.1 ; 39.919,65.668 40.081,65.83 40.081,67.564 ; 39.919,65.668 40.107,65.481 40.107,58.846 ; 40.081,57.226 40.107,57.252 40.107,58.846 ; 48.088,67.736 48.361,67.462 49.475,67.462 49.67,67.658 50.038,67.658 ; 50.038,67.658 51.24,67.658 ; 51.24,67.658 57.717,67.658 58.532,66.843 58.532,51.017 58.615,51.1
  Top Layer w0.32: 58.572,64.668 U1.103@59.842,64.668
  Top Layer w0.35: IC1.7 IC1.8 69.215,73.177 v1(70.764,71.628)
  Top Layer w0.4: IC2.1 30.886,18.186 43.307,30.607 43.307,40.691 44.653,42.037 66.497,42.037 67.335,41.199 67.335,23.597 56.54,12.802 P4.2 ; C31.+ 21.971,87.579 18.9,87.579 IC3.3 ; 36.506,70.79 24.44,70.79 22.327,72.903 22.327,84.684 22.149,84.861 18.593,84.861 18.265,85.189 IC3.3 ; 56.515,49.25 56.542,49.222 ; IC1.3 66.675,79.451 ; IC1.7 67.945,76.403 66.675,77.673 66.675,79.451 ; IC3.3 18.265,90.325 26.721,98.781 63.932,98.781 63.932,95.377 62.916,94.361 62.916,80.366 63.83,79.451 66.675,79.451
  Bottom Layer w0.3: C29.1 20.827,86.944 20.827,88.14 20.85,88.163 ; 35.461,64.874 36.297,65.71
  Bottom Layer w0.4: 20.85,88.163 28.6,88.163 30.988,85.776 30.988,77.876 31.547,77.318 43.637,77.318 43.79,77.165 ; C15.1 24.999,18.344 25.679,19.025 39.599,19.025 ; C20.2 34.397,49.516 35.382,49.516 35.382,63.731 C25.2 35.461,64.874 ; R11.1 35.286,39.67 35.458,39.497 39.573,39.497 ; v1(36.22,72.212) 36.22,65.786 36.297,65.71 ; R10.1@40.005,41.514 40.005,39.929 39.573,39.497 ; C5.2 C7.2@41.199,57.582 ; C7.2@41.323,57.808 43.129,57.808 ; C6.2 43.205,65.71 43.967,66.472 C13.2@45.472,66.472 ; C4.2 43.129,57.808 ; C26.2 43.79,77.165 ; C24.2 44.71,39.96 44.247,39.497 39.573,39.497 ; 45.522,57.813 C13.2 ; C3.2 48.517,57.808 ; 51.429,58.124 C12.2 ; C2.2 53.549,58.036 53.492,58.093 ; P3.2 56.515,19.05 ; C10.2 55.011,63.317 53.492,61.798 53.492,58.093 ; C9.2 54.61,58.093 ; C11.2 55.327,65.157 52.781,62.611 52.781,58.093 ; R9.1 65.1,34.621 ; C23.2 67.215,56.75 ; C22.2 66.218,65.557 ; R1.1 70.764,76.627 v1(70.764,71.628) ; 1.1 66.421,27.61 65.1,28.931 ; 39.573,39.497 39.573,19.05 39.599,19.025 ; 39.599,19.025 56.49,19.025 56.515,19.05 ; 43.129,57.808 45.517,57.808 48.517,57.808 ; 43.79,77.165 51.079,77.165 52.172,76.073 52.172,74.933 C21.2 54.257,72.566 55.195,71.628 v1(70.764,71.628) ; 48.517,57.808 48.802,58.093 51.46,58.093 52.781,58.093 ; 52.781,58.093 53.492,58.093 ; 53.492,58.093 54.61,58.093 ; 54.61,58.093 54.61,53.823 57.302,51.13 C8.2 57.912,51.537 C27.2 67.215,54.363 ; 56.515,19.05 56.515,20.345 65.1,28.931 ; 65.1,28.931 65.1,34.621 ; 65.1,34.621 65.1,46.406 67.215,48.521 67.215,54.363 ; 66.218,65.557 67.386,64.389 67.386,56.921 67.215,56.75 ; 66.218,65.557 69.85,65.557 70.764,66.472 v1(70.764,71.628) ; 67.215,54.363 67.215,56.75
CSO_B: IC1.1 R11.2 U1.38 | length 186.7
  Top Layer w0.254: 16.078,84.684 17.755,83.007 20.066,83.007 20.523,82.55 20.523,79.553 15.062,74.092 7.264,74.092 7.188,74.168 4.369,71.349 4.369,39.421 6.413,37.377 7.473,37.377 7.537,37.313 17.628,37.313 21.565,41.25 30.886,41.25 33.782,44.145 ; v2(35.865,44.018) 33.909,44.018 33.782,44.145 ; U1.38 41.042,46.3 39.827,45.085 34.722,45.085 33.782,44.145 ; 65.583,99.517 69.215,95.885 IC1.1
  Top Layer w0.4: 16.078,84.684 16.078,89.941 25.654,99.517 65.583,99.517
  Bottom Layer w0.254: v2(35.865,44.018) 36.17,44.018 37.186,43.002 R11.2
GND: 1.2 C1.2 C2.1 C3.1 C4.1 C5.1 C6.1 C7.1 C8.1 C9.1 C10.1 C11.1 C12.1 C13.1 C14.2 C15.2 C16.1 C17.1 C18.1 C19.1 C20.1 C21.1 C22.1 C23.1 C24.1 C25.1 C26.1 C27.1 C28.2 C29.2 C30.- C31.- IC1.4 IC2.2 IC2.4 IC3.4 J1.5 LED1.1 P2.1 P2.16 P3.4 P4.4 R2.2 R13.1 S1.2 U1.3 U1.13 U1.25 U1.49 U1.54 U1.60 U1.68 U1.72 U1.73 U1.77 U1.91 U1.96 U1.108 U1.113 U1.130 U1.136 U1.144 Y1.2 | length 235.4
  Top Layer w0.3: v1(31.242,68.097) 31.623,68.478 34.823,68.478 37.141,66.16 U1.3 ; v1(36.551,60.173) 36.551,60.3 37.411,61.16 U1.13 ; v1(36.627,56.947) 36.627,56.007 37.469,55.165 U1.25@38.742,55.165 ; U1.144 40.542,70.032 41.353,70.842 v1@44.577,70.842 ; U1.136@44.52,68.983 v1(44.52,70.785) v1@44.577,70.842 ; v1(46.33,44.501) 46.565,44.736 46.565,47.838 U1.49 ; U1.130 47.542,70.644 47.344,70.842 v1@44.577,70.842 ; U1.54@49.042,47.823 49.042,45.573 49.657,44.958 51.664,44.958 v1(52.045,45.339) U1.60@52.045,47.821 ; v1(55.997,45.984) 56.042,46.029 U1.68@56.042,47.823 ; U1.113@56.042,68.923 U1.113 56.042,76.139 v1(57.043,77.14) ; U1.72@58.042,47.823 58.317,47.549 60.173,47.549 v1(62.284,49.66) U1.73 ; U1.77 61.135,51.66 62.509,53.035 62.509,55.194 v1(62.484,55.22) ; U1.91 60.973,58.66 v1(62.054,59.741) 62.13,59.817 62.13,60.496 61.465,61.16 U1.96 ; U1.108 59.89,67.208 61.57,67.208 62.272,67.911 62.272,68.495 62.281,68.504 65.405,68.504 v1(65.608,68.707)
  Top Layer w0.4: v1(2.032,84.658) IC3.4@7.798,84.658 ; v1(5.69,20.726) IC2.4 ; IC2.2 23.964,20.726 23.964,19.241 24.13,19.075 28.169,19.075 28.931,19.837 28.931,22.225 27.915,23.241 26.822,23.241 v1(26.822,23.368) 26.822,23.495 29.87,26.543 C30.- ; v1(27.889,86.919) 27.889,89.941 C31.- ; Y1.2 v1(52.832,37.211) 54.707,37.211 LED1.1 ; IC1.4 v1(65.405,83.439) ; v1(92.568,18.146) J1.5
  Bottom Layer w0.4: P2.16@7.061,69.317 R13.1@11.1,69.317 ; C29.2@21.661,86.919 v1(27.889,86.919) ; C28.2 23.921,23.368 v1(26.822,23.368) ; C14.2 24.33,81.559 24.356,81.534 v1(26.645,81.534) ; C15.2 26.619,15.824 v1(27.28,15.164) ; v1(31.42,51.74) 32.182,50.978 C20.1 ; v1(31.582,57.826) C19.1 ; C17.1 32.175,61.322 31.039,62.459 31.039,67.894 v1(31.242,68.097) 32.636,68.097 C25.1 ; C7.1 v1(42.971,59.253) 42.971,62.444 C6.1 ; C5.1 41.199,49.682 41.478,49.403 46.507,49.403 46.863,49.759 46.863,51.638 45.232,53.269 v1(44.749,53.269) C4.1 ; C26.1 42.17,72.257 43.585,70.842 44.68,70.842 46.685,72.847 47.935,72.847 48.213,73.125 C18.1 ; C24.1 v1(46.33,44.501) ; C13.1@47.244,66.421 v1(47.244,64.491) 49.555,64.491 49.809,64.745 C12.1 49.809,66.282 50.965,67.437 52.375,67.437 53.035,66.777 C11.1 ; C1.2@49.809,38.964 50.267,39.421 50.622,39.421 v1(52.832,37.211) ; C3.1 v1(50.137,52.454) ; v1(54.686,52.197) 54.889,52.197 55.169,51.918 C2.1 ; C21.1 55.877,75.974 v1(57.043,77.14) ; C8.1@57.246,53.01 C8.1 ; C8.1@57.302,53.066 v1(57.302,54.432) ; C10.1 57.302,61.417 v1(55.524,61.417) 55.524,60.096 56.058,59.563 57.483,59.563 C9.1 ; v1@62.332,49.708 C27.1@64.18,49.708 ; v1(62.484,55.22) 64.3,55.22 C23.1 ; C22.1 65.608,68.397 v1(65.608,68.707) ; R2.2 v1(77.724,78.41)
INIT_B: R10.2 U1.39 | length 8.5
  Top Layer w0.254: U1.39 41.542,46.57 41.885,46.228 42.819,46.228 43.622,45.425 v2(43.622,43.231)
  Bottom Layer w0.254: R10.2@42.022,41.869 R10.2 v2(43.622,43.231)
MISO: IC1.2 R6.2 | length 18.2
  Top Layer w0.254: IC1.2 67.996,81.045 v2(67.996,83.591)
  Bottom Layer w0.254: v2(67.996,83.591) 77.572,83.591 79.883,81.28 R6.2
MOSI: IC1.5 U1.66 | length 102.2
  Top Layer w0.254: U1.66 55.042,45.238 57.277,43.002 60.884,43.002 64.719,46.838 67.183,46.838 67.92,46.101 ; IC1.5 65.405,72.111 89.967,47.549 89.967,33.298 88.037,31.369 75.387,31.369
  Top Layer w0.4: 67.92,46.101 67.92,38.837 75.387,31.369
Net1_3: 1.3 R7.2 | length 5.6
  Bottom Layer w0.254: R7.2 96.368,32.461 1.3
Net1_4: 1.4 R4.2 | length 5.6
  Bottom Layer w0.254: R4.2 91.298,35.23 1.4
Net1_5: 1.5 R5.2 | length 5.8
  Bottom Layer w0.254: R5.2 91.704,37.77 1.5
Net1_6: 1.6 R3.2 | length 5.8
  Bottom Layer w0.254: R3.2 95.987,40.919 1.6
NetIC1_6: IC1.6 R1.2 R2.1 U1.70 | length 167.9
  Top Layer w0.254: U1.70 57.088,47.815 57.088,45.695 v2(58.586,44.196) ; IC1.6 66.7,73.819 v2(66.7,76.048)
  Bottom Layer w0.254: v2(58.586,44.196) 58.51,44.12 55.22,44.12 54.635,44.704 54.635,45.745 51.918,48.463 39.522,48.463 38.837,49.149 38.837,73.152 35.992,75.997 29.769,75.997 28.499,77.267 28.499,82.448 27.356,83.591 17.018,83.591 15.621,84.988 15.621,87.655 21.514,93.548 53.696,93.548 63.398,83.845 63.398,77.445 64.795,76.048 v2(66.7,76.048) ; v2@66.802,75.946 67.589,76.733 69.088,76.733 70.028,77.673 70.028,78.994 71.145,80.112 73.736,80.112 74.397,79.451 74.397,76.606 ; R1.2 74.397,76.606 ; R2.1 75.849,76.606 74.397,76.606
NetLED1_2: LED1.2 R8.1 | length 5.8
  Top Layer w0.254: LED1.2 v2(59.614,37.186)
  Bottom Layer w0.254: v2(59.614,37.186) 62.67,37.186 R8.1
NetP1_1: P1.1 U1.119 | length 32.1
  Top Layer w0.254: P1.1@44.298,97.434 P1.1 53.042,88.74 U1.119
NetP1_2: P1.2 U1.118 | length 31.2
  Top Layer w0.254: P1.2 53.542,90.78 U1.118
NetP1_3: P1.3 U1.117 | length 30.4
  Top Layer w0.254: P1.3 54.088,92.775 54.088,69.006 U1.117
NetP1_4: P1.4 U1.116 | length 29.6
  Top Layer w0.254: P1.4 54.588,94.815 54.588,69.006 U1.116
NetP1_5: P1.5 U1.115 | length 28.7
  Top Layer w0.254: P1.5 55.042,96.9 U1.115
NetP1_6: P1.6 U1.114 | length 29.1
  Top Layer w0.254: U1.114 55.588,69.006 55.588,95.974 P1.6
NetP1_7: P1.7 U1.112 | length 32
  Top Layer w0.254: U1.112 56.588,69.006 56.588,74.622 58.725,76.759 58.725,77.699 56.019,80.404 56.019,93.865 P1.7
NetP1_8: P1.8 U1.111 | length 32.9
  Top Layer w0.254: U1.111 57.042,74.391 59.157,76.505 59.157,77.877 56.667,80.367 56.667,92.456 61.646,97.434 P1.8
NetP2_3: P2.3 R12.2 R13.2 | length 41.7
  Bottom Layer w0.254: P2.3 3.658,39.7 3.658,63.525 5.664,65.532 11.633,65.532 12.954,66.848 R13.2
NetP2_4: P2.4 U1.27 | length 40.3
  Top Layer w0.254: P2.4 16.967,38.862 23.698,45.593 23.698,49.505 28.359,54.165 U1.27@38.742,54.165
NetP2_5: P2.5 U1.26 | length 39.3
  Top Layer w0.254: P2.5 7.087,41.453 17.831,41.453 22.53,46.152 22.53,49.733 27.457,54.66 37.532,54.66 37.534,54.658 38.74,54.658 U1.26
NetP2_6: P2.6 U1.12 | length 43.8
  Top Layer w0.254: P2.6 19.279,43.942 21.692,46.355 21.692,51.156 24.536,54 24.536,57.252 27.534,60.249 34.595,60.249 36.011,61.665 38.738,61.665 U1.12
NetP2_7: P2.7 U1.11 | length 43.2
  Top Layer w0.254: P2.7@7.468,46.914 P2.7 20.345,46.482 20.726,46.863 20.726,51.384 23.774,54.432 23.774,57.38 27.241,60.846 34.112,60.846 35.426,62.16 U1.11
NetP2_8: P2.8 U1.10 | length 40.3
  Top Layer w0.254: P2.8 7.163,48.895 18.796,48.895 19.634,49.733 19.634,51.562 22.962,54.889 22.962,57.937 26.645,61.62 33.553,61.62 34.593,62.66 U1.10
NetP2_9: P2.9 U1.9 | length 38.3
  Top Layer w0.254: P2.9 7.163,51.689 18.745,51.689 22.225,55.169 22.225,58.306 26.155,62.237 33.172,62.237 34.096,63.16 U1.9
NetP2_10: P2.10 U1.8 | length 37
  Top Layer w0.254: P2.10 19.507,54.102 21.514,56.109 21.514,58.471 25.832,62.789 32.91,62.789 33.782,63.66 U1.8
NetP2_11: P2.11 U1.7 | length 34.8
  Top Layer w0.254: P2.11 18.44,56.642 25.07,63.271 32.41,63.271 33.299,64.16 U1.7
NetP2_12: P2.12 U1.6 | length 34
  Top Layer w0.254: P2.12 19.482,59.182 24.155,63.856 31.674,63.856 32.547,64.729 37.781,64.729 37.804,64.706 38.697,64.706 U1.6
NetP2_13: P2.13 U1.5 | length 33.1
  Top Layer w0.254: P2.13 7.239,61.925 20.752,61.925 23.197,64.37 31.198,64.37 31.988,65.16 U1.5
NetP2_14: P2.14 U1.2 | length 36.7
  Top Layer w0.254: P2.14 21.565,64.262 ; 36.297,70.053 36.703,69.647 36.703,67.558 37.601,66.66 U1.2
  Top Layer w0.3: 21.565,64.262 27.356,70.053 36.297,70.053
NetR3_1: R3.1 U1.107 | length 42.5
  Top Layer w0.254: U1.107 66.004,66.66 87.376,45.288 v2(87.376,40.919)
  Bottom Layer w0.254: v2(87.376,40.919) R3.1
NetR4_1: R4.1 U1.106 | length 47.4
  Top Layer w0.254: U1.106 65.539,66.16 85.242,46.457 85.242,37.668 87.122,35.789 v2(87.122,35.433)
  Bottom Layer w0.254: v2(87.122,35.433) R4.1
NetR5_1: R5.1 U1.110 | length 55.4
  Top Layer w0.254: U1.110 57.542,70.7 58.191,71.349 65.253,71.349 89.195,47.407 89.195,40.325 v2(87.249,38.379)
  Bottom Layer w0.254: v2(87.249,38.379) R5.1
NetR6_1: R6.1 U1.65 | length 56.5
  Top Layer w0.254: U1.65 54.542,44.797 56.794,42.545 61.468,42.545 64.491,45.568 v2(66.548,45.568)
  Bottom Layer w0.254: v2(66.548,45.568) 70.874,45.568 70.883,45.559 79.285,53.961 79.285,76.264 79.658,76.637 R6.1
NetR7_1: R7.1 U1.109 | length 65.2
  Top Layer w0.254: U1.109 58.042,70.438 58.522,70.917 65.074,70.917 88.595,47.395 88.595,40.336 87.985,39.726 86.436,39.726 85.877,39.167 85.877,38.227 87.02,37.084 88.468,37.084 89.535,36.017 89.535,33.477 88.519,32.461 v2(87.249,32.461)
  Bottom Layer w0.254: v2@86.97,32.461 v2(87.249,32.461) R7.1
NetR8_2: R8.2 U1.71 | length 13.1
  Top Layer w0.254: U1.71 57.565,47.86 57.565,46.944 57.854,46.656 58.91,45.6 61.162,45.6 v2(61.205,45.644)
  Bottom Layer w0.254: v2(61.205,45.644) 63.229,43.62 R8.2
NetR9_2: R9.2 S1.1 U1.37 | length 36.2
  Top Layer w0.254: v2(39.04,46.279) 40.208,46.279 40.542,46.613 U1.37
  Bottom Layer w0.254: v2(39.04,46.279) 49.149,46.279 49.733,45.695 49.733,44.933 54.026,40.64 54.026,36.703 S1.1 59.929,30.8 R9.2
OUT: C1.1 U1.88 Y1.3 | length 59.6
  Top Layer w0.254: v2(45.796,37.211) Y1.3 ; v2(51.714,40.894) 65.075,40.894 66.269,39.7 v2(66.294,39.7) ; U1.88 60.984,57.16 61.477,56.667 70.256,56.667 73.685,53.238 v2(73.685,44.602)
  Bottom Layer w0.254: v2(45.796,37.211) 45.796,38.151 47.066,39.421 C1.1 48.164,40.95 48.463,41.25 50.876,41.25 51.232,40.894 v2(51.714,40.894) ; v2(66.294,39.7) 70.358,43.764 72.847,43.764 v2(73.685,44.602)
VCC: C14.1 IC3.1 J1.1 P2.2 P2.15 P3.1 P4.1 R12.1 Y1.1 Y1.4 | length 265.1
  Top Layer w0.4: P2.2 6.782,33.528 4.216,33.528 2.591,31.902 ; IC3.1@18.059,81.659 18.059,79.045 15.9,76.886 5.994,76.886 2.591,73.482 2.591,31.902 ; IC3.1 18.265,81.354 v1(19.329,80.289) ; Y1.4 Y1.1 49.86,15.494 47.142,12.776 46.888,12.776 ; P4.1@59.055,9.779 P3.1 56.388,2.718 48.108,2.718 46.888,3.937 46.888,12.776 ; P4.1 60.731,9.804 61.57,10.643 61.57,13.843 63.273,15.546 J1.1 ; 2.591,31.902 2.591,14.326 4.14,12.776 46.888,12.776
  Bottom Layer w0.4: P2.15 4.75,66.802 3.531,68.021 3.531,73.025 6.401,75.895 19.66,75.895 22.708,78.943 C14.1@22.708,81.763 ; P2.15@7.112,66.878 R12.1 ; v1(19.329,80.289) 19.888,80.289 21.107,81.509 C14.1
pads on no net: J1.2 J1.3 J1.4 J1.M1 J1.M2 J1.S1 J1.S2 J1.S3 J1.S4 U1.1 U1.14 U1.15 U1.16 U1.17 U1.21 U1.22 U1.23 U1.24 U1.29 U1.30 U1.32 U1.33 U1.34 U1.35 U1.40 U1.41 U1.43 U1.44 U1.45 U1.46 U1.47 U1.48 U1.50 U1.51 U1.55 U1.56 U1.57 U1.58 U1.59 U1.61 U1.62 U1.64 U1.67 U1.74 U1.75 U1.78 U1.79 U1.80 U1.81 U1.82 U1.83 U1.84 U1.85 U1.87 U1.92 U1.93 U1.94 U1.95 U1.97 U1.98 U1.99 U1.100 U1.101 U1.102 U1.104 U1.105 U1.120 U1.121 U1.123 U1.124 U1.126 U1.127 U1.131 U1.132 U1.133 U1.134 U1.137 U1.138 U1.139 U1.140 U1.141 U1.142 U1.143

## Polygon pours and split planes (outlines as drawn)
3.3V on VCC "3.3V_L03_P001" (solid, pour order 1): -0.08,64.313 96.184,64.313 96.2,59.141 96.317,59.258 96.291,59.258 96.19,59.36 96.19,101.702 80.62,101.702 80.493,101.829 80.264,101.6 -0.127,101.6
1.2V on VCC "1.2V_L03_P000" (solid, pour order 0): 0,0.051 96.19,0.051 96.368,-0.127 96.368,4.115 100,7.747 100,55.575 96.317,59.258 96.291,59.258 96.19,59.36 96.19,59.385 80.62,59.258 -0.074,59.258
GND on GND (split plane): 80.62,101.191 95.679,101.191 95.679,59.36 95.689,59.26 95.718,59.164 95.765,59.076 95.829,58.999 95.93,58.897 96.008,58.834 96.033,58.821 99.489,55.364 99.489,7.958 96.007,4.476 95.943,4.398 95.896,4.31 95.867,4.214 95.857,4.115 95.857,0.561 0.51,0.561 0.384,101.09 80.264,101.09 80.364,101.099 80.459,101.128 80.548,101.176 80.572,101.196

## Keep-outs
Keep-Out Layer:
  lines w0.254: -0.66,102.159 -0.66,-0.711 0.203,-0.711 96.952,-0.711 97.18,-0.483 97.18,4.064 100.711,7.595 100.711,56.185 96.952,59.944 96.952,102.159 96.799,102.311 -0.66,102.311

## Text inside footprints (layer, text, board x,y; h text height)
C30: Top Overlay "+" at 26.492,29.713 h0.89
C31: Top Overlay "+" at 25.451,91.206 h0.89